# Allegro board HY_TP4056_V10_210902.brd
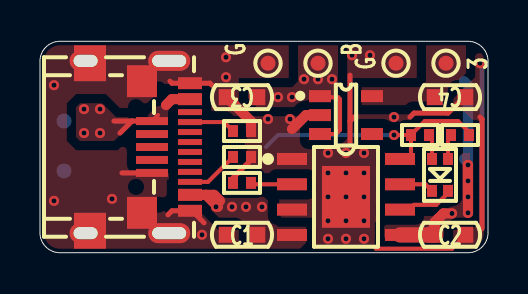
[diagram p0: board, top side]
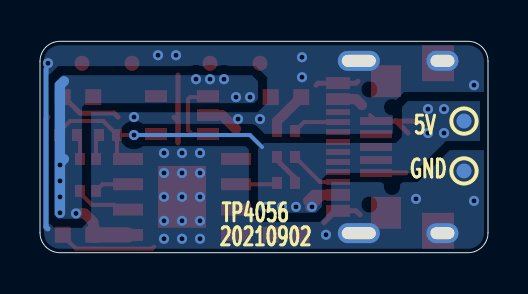
[diagram p1: board, bottom side, seen from below]

Outline 22.4 x 10.6 mm; copper layers: TOP, BOTTOM. Coordinates in mm from the lower left corner of the outline.
Outline path: 0,9.6 arc(0.29,10.31) 1,10.6 21.4,10.6 arc(22.11,10.31) 22.4,9.6 22.4,1 arc(22.11,0.29) 21.4,0 1,0 arc(0.29,0.29) 0,1 0,9.6

## Design rules (mm)
constraint set DEFAULT: min track width 0.203, pair gap 0.203

## Placement (name value [footprint] x y rotation side)
C1  10uF_10V  [C0603]  10.1 0.9 0 top
C2  10uF_10V  [C0603]  20.5 0.9 180 top
C3  10uF_10V  [C0603]  10.1 7.8 180 top
C4  10uF_10V  [C0603]  20.5 7.8 0 top
D1  -  [XL-2012SURUGC]  20 3.9 90 top
NOREF  -  []  0 0 90 top
NOREF#2  -  []  0 0 0 top
R2  2.4K  [R0402]  10.1 3.5 0 top
R4  4.7K  [R0402]  19 5.9 0 top
R5  4.7K  [R0402]  21 5.9 180 top
R6  4.7K  [R0402]  10.1 6.1 180 top
R9  4.7K/NI  [R0402]  10.1 4.8 0 top
TP1  TestPoint  [TP-0R75]  1.2 6.6 180 bottom
TP2  TestPoint  [TP-0R75]  13.9 9.5 0 top
TP3  TestPoint  [TP-0R75]  17.8 9.5 0 top
TP4  TestPoint  [TP-0R75]  11.4 9.5 0 top
TP5  TestPoint  [TP-0R75]  20.3 9.5 0 top
TP6  TestPoint  [TP-0R75]  1.2 4.1 180 bottom
U1  TP4056  [SOIC8-3R10X2R40]  15.3 2.8 270 top
U2  SPX3819M5-L-3-3/TR  [SOT23-5]  15.3 6.9 270 top
USB1  USB-MICRO  [USB-U-F-M5SS-W-1]  2.5 5.3 270 top
USB2  -  [TYPE-C-31-M-12]  7.5 5.3 270 top

## Library data of the parts
C1-C4 = CAP NP_2
D1 = XL-2012SURUGC
R2 R4-R6 R9 = R_Generic
TP1-TP6 = TestPoint
U1 = TP4056
U2 = SPX3819M5-L-1-2
USB1 = USB-MICRO
USB2 = TYPE-C_16P

## Footprints (pads in the part's own frame, mm; a bottom-side part is the same pattern mirrored in y, then rotated)
C0603
  rect 0.8x0.8 smd: 1(-0.762,0) 2(0.762,0)
R0402
  rect 0.5x0.6 smd: 1(-0.45,0) 2(0.45,0)
SOIC8-3R10X2R40
  rect 0.6x1.5 smd: 1(-1.9,-2.7) 2(-0.63,-2.7) 3(0.64,-2.7) 4(1.91,-2.7) 5(1.91,2.7) 6(0.64,2.7) 7(-0.63,2.7) 8(-1.9,2.7)
  rect 3.1x2.4 smd: 9(0,0)
SOT23-5
  rect 0.6x1.1 smd: 1(-0.95,-1.3) 2(0,-1.3) 3(0.95,-1.3) 4(0.95,1.3) 5(-0.95,1.3)
TP-0R75
  round 0.75 smd: 1(0,0)
TYPE-C-31-M-12
  rect 0.6x1.2 smd: 1(-3.2,0) 2(-2.4,0) 11(2.4,0) 12(3.2,0)
  rect 0.3x1.2 smd: 3(-1.75,0) 4(-1.25,0) 5(-0.75,0) 6(-0.25,0) 7(0.25,0) 8(0.75,0) 9(1.25,0) 10(1.75,0)
  oval 1x2.1 hole 0.6x1.7: 13(-4.32,-1.04) 14(4.32,-1.04)
  oval 1x1.6 hole 0.6x1.2: 15(-4.32,-5.22) 16(4.32,-5.22)
USB-U-F-M5SS-W-1
  rect 0.4x1.6 smd: 1(-1.3,3.1) 2(-0.65,3.1) 3(0,3.1) 4(0.65,3.1) 5(1.3,3.1)
  rect 1.6x1.5 smd: 6(-3.3,2.6) 7(3.3,2.6)
  rect 1.8x1.6 smd: 8(-4.2,0) 9(4.2,0)
XL-2012SURUGC
  rect 0.6x0.5 smd: 1(-0.8,0.4) 2(0.8,0.4) 3(-0.8,-0.4) 4(0.8,-0.4)

## Nets
GND: C1.1 C2.1 C3.2 C4.2 R2.1 R6.1 R9.2 TP3.1 TP4.1 TP6.1 U1.1 U1.3 U1.9 U2.2 USB1.5 USB1.6 USB1.7 USB1.8 USB1.9 USB2.1 USB2.12 USB2.13 USB2.14 USB2.15 USB2.16
VCC_3.3V: C4.1 TP5.1 U2.5(VOUT)
VCC_BAT_4.2V: C2.2 C3.1 TP2.1 U1.5 U2.1 U2.3
VCC_USB_5V: C1.2 R4.1 R5.1 TP1.1 U1.4(VCC) U1.8 USB1.1(VBUS) USB2.2 USB2.11(VBUS2)
N17433703: R6.2 USB2.4
N17433725: R9.1 USB2.10
N17435262: R2.2 U1.2
N17435829: D1.1(R-) U1.7
N17435834: D1.3 U1.6
N17437418: D1.4 R5.2
N17437421: D1.2 R4.2

Pads without a net: U2 4; USB1 2 3 4; USB2 3 5 6 7 8 9

## Via types
v1: diameter 0.508, hole 0.254, TOP to BOTTOM, 46 vias

## Routing (per net, layer and track width the routed paths; a pad name or vN(x,y) marks a point on that pad's centre or on a via; arc(x,y) is an arc through that point)
GND: length 36.8
  TOP w0.203: C2.1 21.26,0.86 20.6,0.2 16.8,0.2 16.7,0.3
  TOP w0.254: 6.5,8.6 6.6,8.5 USB2.1 8.5,8.5 8.6,8.4 ; 18.5,6.8 18.7,7 20.4,7 21.2,7.8 C4.2 ; 15.5,5.5 15.5,6.6 ; 15.5,6.6 15.7,6.8 ; 15.5,6.6 15.5,8.9 ; 22,6.8 22.1,6.7 22.1,1.2 ; 8.2,1.5 7.6,2.1 USB2.12 6.6,2.1 6.4,1.9 ; R9.2 10.55,4.65 9.65,3.75 R2.1 ; USB1.5 4.1,4
  TOP w0.508: 12.6,6.2 13.3,6.9 U2.2 ; R6.1 10.55,6.59 C3.2
  BOTTOM w0.254: 22,1.2 22.1,1.3 22.1,9.2
  vias: v1(0.7,8.4) v1(0.7,2.6) v1(3.6,2.7) v1(8.1,0.9) v1(9.3,9.8) v1(9.3,8.8) v1(11.4,6.7) v1(12.5,6.7) v1(14.4,5) v1(14.4,4) v1(14.4,2.8) v1(14.4,1.6) v1(14.4,0.7) v1(15.3,5) v1(15.3,4) v1(15.3,2.8) v1(15.3,1.6) v1(15.3,0.7) v1(15.6,9.9) v1(16.2,5) v1(16.2,4) v1(16.2,2.8) v1(16.2,1.6) v1(16.2,0.7) v1(16.5,9.9) v1(17.7,6.8) v1(22,9.5)
VCC_BAT_4.2V: length 16.5
  TOP w0.203: U2.1 14.05,7.8 14.9,7.8 15,7.7 15,6.15 14.8,5.95 U2.3
  TOP w0.508: v1(21.4,2) v1(21.4,2.8) v1(21.4,3.6) v1(21.4,4.4) ; v1(20.6,1.97) 20.17,1.97 19.74,1.54 19.74,1.26 ; 19.74,1.26 19.7,1.3 ; 19.74,1.26 C2.2
  TOP w0.762: C2.2 19.73,0.89 U1.5
  BOTTOM w0.508: 21.4,4.5 v1(21.4,4.4) v1(21.4,3.6) v1(21.4,2.8) v1(21.4,2) ; 21.4,4.5 21.2,4.7 ; 21.4,4.5 21.4,8.4 21.2,8.6
  vias: v1(11.9,7.8) v1(12.6,7.8) v1(13.2,8.7) v1(13.9,8.7) v1(14.6,8.7)
VCC_USB_5V: length 19.7
  TOP w0.203: R5.1 21.45,6.05 20.9,6.6 19.24,6.6 18.55,5.91 R4.1 ; USB1.1 5.9,6.9 ; R4.1 v1(17.7,5.9) ; R4.1 18.55,4.9 18.35,4.7 U1.8
  TOP w0.254: USB1.1 4.6,6.6 ; 4.6,6.6 3.7,6.6 ; 4.6,6.6 4,6
  TOP w0.508: 9,2.6 8.7,2.9 8.3,2.9 ; USB2.2 6.6,7.7 6.3,7.4 ; 8.3,2.9 USB2.11 ; 8.3,2.9 8.9,2.3
  BOTTOM w0.203: v1(17.7,5.9) 11.9,5.9 11.3,5.3
  vias: v1(2.2,7.2) v1(2.2,6) v1(3,7.2) v1(3,6) v1(8.8,2.3) v1(9.6,2.3) v1(10.3,2.3) v1(11.1,2.3)
N17433703: length 2.3
  TOP w0.203: R6.2 9.2,6.55 USB2.4
N17433725: length 2.7
  TOP w0.203: R9.1 8.4,3.55 USB2.10
N17435262: length 2.1
  TOP w0.203: R2.2 10.62,3.43 U1.2
N17435829: length 1.7
  TOP w0.203: U1.7 19.27,3.43 D1.1
N17435834: length 2.9
  TOP w0.203: D1.3 20.4,2.99 19.81,2.4 18.7,2.4 18.46,2.16 U1.6
N17437418: length 1.3
  TOP w0.203: R5.2 20.4,5.75 D1.4
N17437421: length 1.3
  TOP w0.203: D1.2 19.6,5.75 R4.2

## Copper pours and planes (outline as drawn; the poured copper is in the pictures)
GND on TOP: 0.2,9.6 0.43,10.17 1,10.4 21.4,10.4 21.97,10.17 22.2,9.6 22.2,1 21.97,0.43 21.4,0.2 1,0.2 0.43,0.43 0.2,1 ; 1 cut-out
GND on BOTTOM: 0.2,9.6 0.43,10.17 1,10.4 21.4,10.4 21.97,10.17 22.2,9.6 22.2,1 21.97,0.43 21.4,0.2 1,0.2 0.43,0.43 0.2,1
VCC_3.3V on TOP: 16,8.3 19,8.3 19.3,8.6 19.3,10.4 21.3,10.4 21.3,9 20.2,7.9 20.2,7.4 16,7.4
VCC_BAT_4.2V on TOP: 10.4,7.3 13,7.3 13.3,7.6 14.9,7.6 14.9,10.4 12.9,10.4 12.9,8.6 12.6,8.3 10.4,8.3
VCC_BAT_4.2V on TOP: 17.2,0.5 20.1,0.5 20.2,0.6 20.2,1.3 20.5,1.6 21.4,1.6 21.7,1.9 21.7,4.8 21.5,5 21.1,5 20.9,4.8 20.9,2.6 20.6,2.3 19.4,2.3 18.8,1.7 17.6,1.7 17.2,1.3
VCC_BAT_4.2V on BOTTOM: 11.8,8.9 21.3,8.9 21.7,8.5 21.7,1.9 21.5,1.7 20.5,1.7 20.3,1.9 20.3,7.3 20.1,7.5 11.7,7.5 11.5,7.7 11.5,8.6
VCC_USB_5V on TOP: 8.1,8 6.5,8 5.3,6.8 3.8,6.8 3.1,7.5 2,7.5 1.8,7.3 1.8,5.8 2,5.6 3.7,5.6 4.5,6.4 6.4,6.4 6.4,7.1 6.7,7.4 8.1,7.4
VCC_USB_5V on TOP: 6.8,3.2 8.9,3.2 9.3,2.8 11.2,2.8 11.5,2.5 11.5,1.7 11.9,1.3 13.3,1.3 13.3,0.5 13,0.2 10.6,0.2 10.4,0.4 10.4,1.4 10.2,1.6 9.1,1.6 8.2,2.5 6.8,2.5
VCC_USB_5V on BOTTOM: 0.4,7.6 4,7.6 4.3,7.3 4.3,5.8 4.6,5.5 11.2,5.5 11.5,5.2 11.5,2.2 11.3,2 8.6,2 8.3,2.3 8.3,3.7 8,4 3.7,4 2.1,5.6 0.4,5.6

## Text on the board
Ref Des/Silkscreen Bottom: 5V | GND | TP4056 | 20210902
Ref Des/Silkscreen Top: G | B | 3
DISPLAY_TOP: FIGURE | FINISHED_SIZE | 0.254 | 1.2x0.6 | 1.7x0.6 | DRILL CHART: TOP to BOTTOM | ALL UNITS ARE IN MILLIMETERS | PLATED | QTY | 46 | 2 | 50 | TOTAL HOLES:
